# EAGLE board sonda3 (EAGLE 4.16)
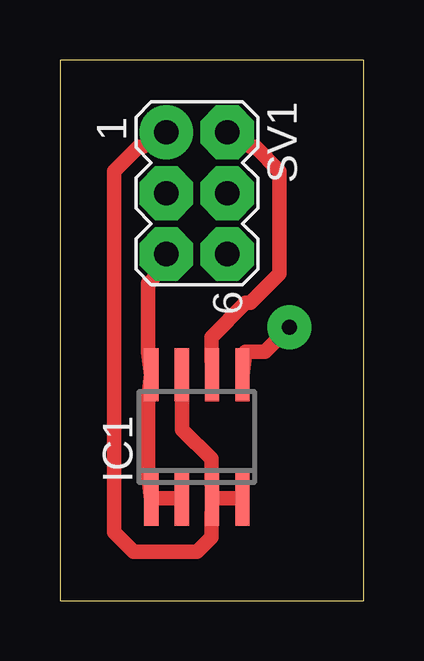
[diagram p0: board, top side]
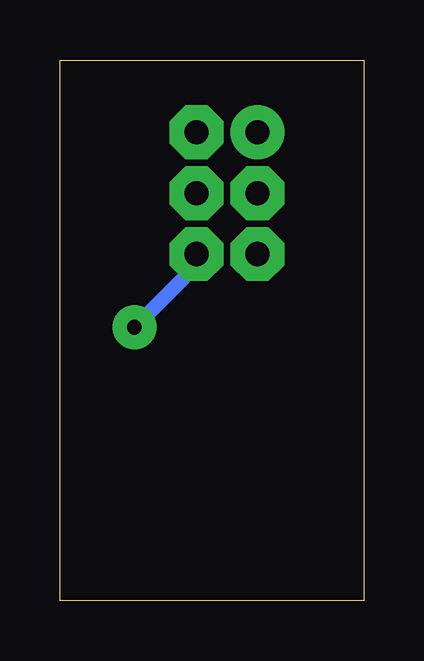
[diagram p1: board, bottom side, seen from below]

Size 12.68 x 22.53 mm. Coordinates in mm from the lower left corner, seen from the top.
Outline: 0,0 12.68,0 12.68,22.53 0,22.53 0,0
Copper layers (1*16): Top 0.035mm / dielectric 1.5mm / Bottom 0.035mm
Design rules "mio2": minimum track width 24mil, minimum drill 24mil, track to track 24mil, track to pad 24mil, pad to pad 24mil, via to via 24mil, smd to smd 24mil, copper to edge 40mil, drill to drill 8mil, minimum pad ring 24mil, minimum via ring 24mil, stop-mask expansion 4mil, vias tented up to drill 0mil, thermal gap 10mil

## Footprints (pad centres in the part's own frame; a part is rotated, then mirrored left to right if it is on the bottom)
SO-08 = smd 0.6 x 2.2: 1 -1.905,-2.6; 2 -0.635,-2.6; 3 0.635,-2.6; 4 1.905,-2.6; 5 1.905,2.6; 6 0.635,2.6; 7 -0.635,2.6; 8 -1.905,2.6
MA03-2 = drill 1.016 round: 1 -2.54,-1.27 | drill 1.016 octagon: 2 -2.54,1.27; 3 0,-1.27; 4 0,1.27; 5 2.54,-1.27; 6 2.54,1.27

## Placement (x,y rotation side)
IC1  24LC16BSN  [SO-08]  5.71,6.82 0 top
SV1  [MA03-2]  5.71,16.98 270 top
U$1  [A4P-LOC]  -76.84,-111.29 0 top  (outside the outline)

## Library data of the parts
IC1 = microchip
SV1 = con-lstb
U$1 = frames

## Nets
GND: IC1.3 IC1.4 IC1.7 SV1.1
N$1: IC1.6 SV1.2
N$2: IC1.5 SV1.6
VCC: IC1.1 IC1.2 IC1.8 SV1.5

## Tracks (layer width: path | path; a pad name or v marks a point on that pad's centre or on a via)
GND
  Top 0.61: IC1.3 6.52,4.28 7.34,4.28 IC1.4 | IC1.7 5.1,8.34 5.1,7.12 6.32,5.91 6.32,5.3 IC1.3 | SV1.1 3.48,18.91 3.27,18.91 2.26,17.89 2.26,2.86 3.07,2.04 5.71,2.04 6.32,2.65 6.32,3.26 IC1.3
N$1
  Top 0.61: IC1.6 6.32,10.38 6.32,10.99 7.74,12.41 7.95,12.41 9.16,13.63 9.16,17.89 8.15,18.91 7.95,18.91 SV1.2
N$2  (via drill 0.61)
  Top 0.61: v9.57,11.39 8.56,10.38 7.74,10.38 IC1.5
  Bottom 0.61: v9.57,11.39 7.54,13.42 SV1.6
VCC
  Top 0.61: IC1.2 4.9,4.28 4.08,4.28 IC1.1 3.68,5.3 3.68,8.34 IC1.8 3.68,10.38 3.68,13.22 3.88,13.42 SV1.5

## Text on the board
Pads: farla single layer e saldare il filo nel vias anzichè sul connettore | www.pyacqua.net